# EAGLE board tm4cShield_v2.0 (EAGLE 8.0.0)
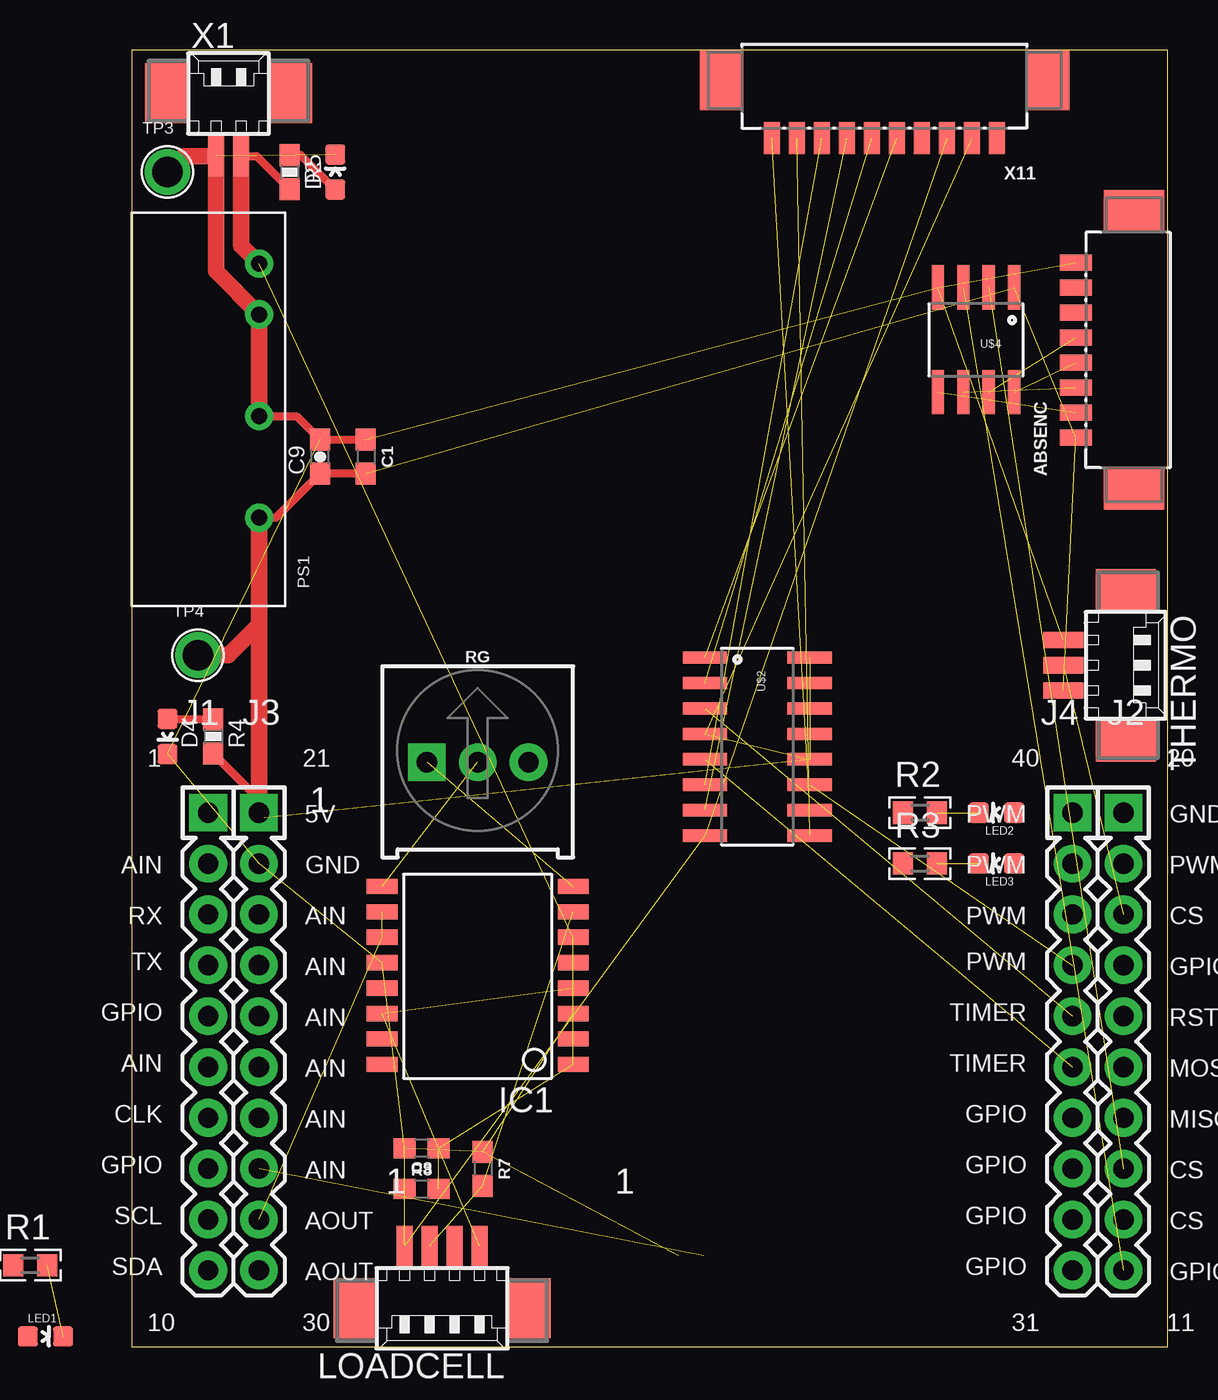
[diagram p0: board, top side]
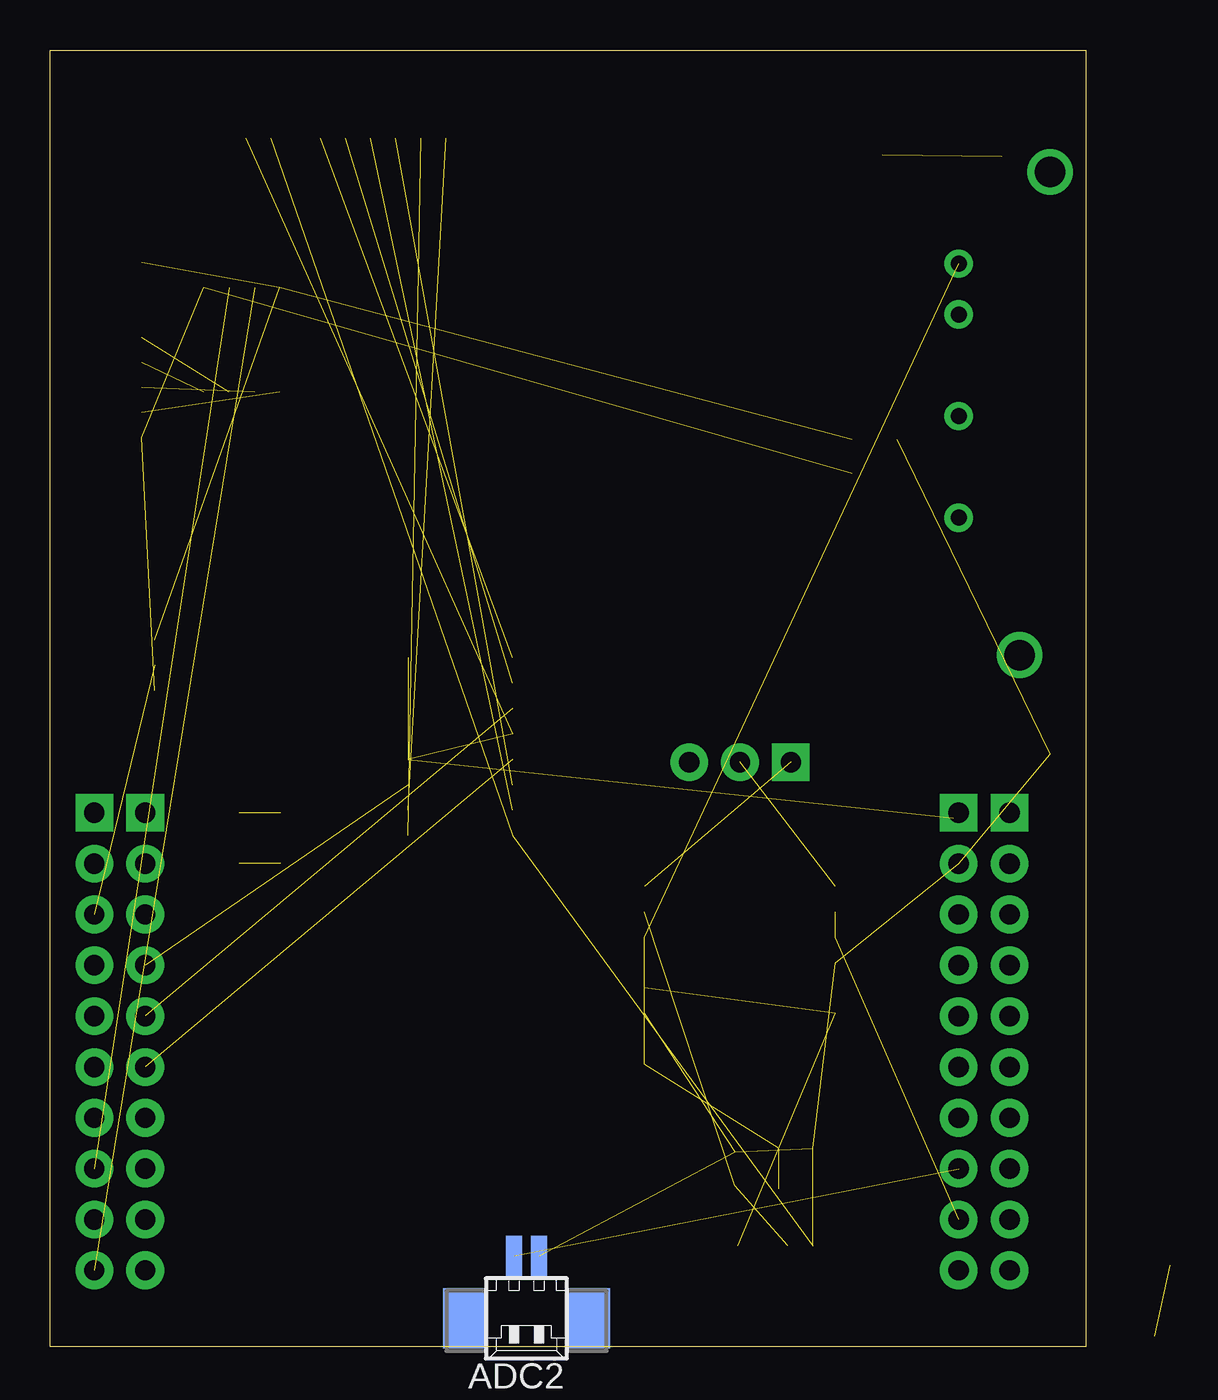
[diagram p1: board, bottom side, seen from below]

Size 51.74 x 64.76 mm. Coordinates in mm from the lower left corner, seen from the top.
Outline: 0,0 51.74,0 51.74,64.76 0,64.76 0,0
Copper layers (1*16): Top 0.035mm / dielectric 1.5mm / Bottom 0.035mm
Design rules "SparkFun": minimum track width 8mil, minimum drill 20mil, track to track 8mil, track to pad 8mil, pad to pad 8mil, via to via 8mil, smd to smd 8mil, copper to edge 10mil, drill to drill 8mil, minimum pad ring 12mil, minimum via ring 10mil, stop-mask expansion 4mil, vias tented up to drill 25mil, thermal gap 10mil

## Footprints (pad centres in the part's own frame; a part is rotated, then mirrored left to right if it is on the bottom)
4X10-BOOSTERPACK = drill 1.016 pad 1.88 square: 1 0,10.16; 20 45.72,10.16; 21 2.54,10.16; 40 43.18,10.16 | drill 1.016 pad 1.88: 2 0,7.62; 3 0,5.08; 4 0,2.54; 5 0,0; 6 0,-2.54; 7 0,-5.08; 8 0,-7.62; 9 0,-10.16; 10 0,-12.7; 11 45.72,-12.7; 12 45.72,-10.16; 13 45.72,-7.62; 14 45.72,-5.08; 15 45.72,-2.54; 16 45.72,0; 17 45.72,2.54; 18 45.72,5.08; 19 45.72,7.62; 22 2.54,7.62; 23 2.54,5.08; 24 2.54,2.54; 25 2.54,0; 26 2.54,-2.54; 27 2.54,-5.08; 28 2.54,-7.62; 29 2.54,-10.16; 30 2.54,-12.7; 31 43.18,-12.7; 32 43.18,-10.16; 33 43.18,-7.62; 34 43.18,-5.08; 35 43.18,-2.54; 36 43.18,0; 37 43.18,2.54; 38 43.18,5.08; 39 43.18,7.62
PB-53261-08 = smd 0.8 x 1.6: 1 -4.375,1.1; 2 -3.125,1.1; 3 -1.875,1.1; 4 -0.625,1.1; 5 0.625,1.1; 6 1.875,1.1; 7 3.125,1.1; 8 4.375,1.1 | smd 2.1 x 3: MNT1 -6.925,-1.8; MNT2 6.925,-1.8
53261-02 = smd 0.8 x 2: 1 0.625,-2.5; 2 -0.625,-2.5 | smd 2.1 x 3: S1 3.125,0.625; S2 -3.125,0.625
0603 = smd 1.1 x 1: 1 -0.85,0; 2 0.85,0
0603-CAP = smd 1.1 x 1: 1 -0.85,0; 2 0.85,0
LED-0603 = smd 1 x 1: A 0,-0.877; C 0,0.877
SO16-1 = smd 0.762 x 1.524: 1 -4.445,-4.775; 2 -3.175,-4.775; 3 -1.905,-4.775; 4 -0.635,-4.775; 5 0.635,-4.775; 6 1.905,-4.775; 7 3.175,-4.775; 8 4.445,-4.775; 9 4.445,4.775; 10 3.175,4.775; 11 1.905,4.775; 12 0.635,4.775; 13 -0.635,4.775; 14 -1.905,4.775; 15 -3.175,4.775; 16 -4.445,4.775
53261-04 = smd 0.8 x 2: 1 1.875,-2.5; 2 0.625,-2.5; 3 -0.625,-2.5; 4 -1.875,-2.5 | smd 2.1 x 3: S1 4.375,0.625; S2 -4.375,0.625
MURATA_NMG = drill 0.8: VIN+ 2.54,6.35; VIN- 5.08,6.35; VOUT+ 15.24,6.35; VOUT- 10.16,6.35
RESC0603 = smd 1 x 1.1: 1 -0.85,0; 2 0.85,0
0603-RES = smd 1.1 x 1: 1 -0.85,0; 2 0.85,0
TRIMPOT-PTH-3386U = drill 1.016 pad 1.88 square: 1 -2.54,-0.015 | drill 1.016 pad 1.88: 2 0,-0.015; 3 2.54,-0.015
53261-03 = smd 0.8 x 2: 1 1.25,-2.5; 2 0,-2.5; 3 -1.25,-2.5 | smd 2.1 x 3: S1 3.75,0.625; S2 -3.75,0.625
5000_SERIES_TESTPOINT = drill 1.524 pad 2.032: P$1 0,0
SOIC16 = smd 0.61 x 2.21: 1 -4.445,-2.616; 2 -3.175,-2.616; 3 -1.905,-2.616; 4 -0.635,-2.616; 5 0.635,-2.616; 6 1.905,-2.616; 7 3.175,-2.616; 8 4.445,-2.616; 9 4.445,2.616; 10 3.175,2.616; 11 1.905,2.616; 12 0.635,2.616; 13 -0.635,2.616; 14 -1.905,2.616; 15 -3.175,2.616; 16 -4.445,2.616
SOIC8 = smd 0.61 x 2.21: 1 -1.905,-2.616; 2 -0.635,-2.616; 3 0.635,-2.616; 4 1.905,-2.616; 5 1.905,2.616; 6 0.635,2.616; 7 -0.635,2.616; 8 -1.905,2.616
PB-53261-10 = smd 0.8 x 1.6: 1 -5.625,1.1; 2 -4.375,1.1; 3 -3.125,1.1; 4 -1.875,1.1; 5 -0.625,1.1; 6 0.625,1.1; 7 1.875,1.1; 8 3.125,1.1; 9 4.375,1.1; 10 5.625,1.1 | smd 2.1 x 3: MNT1 -8.175,-1.8; MNT2 8.175,-1.8

## Placement (x,y rotation side)
A1  [4X10-BOOSTERPACK]  3.81,16.51 0 top
ABSENC  x5  [PB-53261-08]  48.26,49.78 90 top
ADC2  x3  [53261-02]  27.94,2.03 180 bottom
C1  0.1uF  [0603]  11.68,44.45 270 top
C3  0.1uF  [0603]  14.48,7.87 0 top
C9  2.2u  [0603-CAP]  9.4,44.45 90 top
D2  12V  [LED-0603]  10.16,58.67 0 top
D4  5V  [LED-0603]  1.78,30.48 180 top
IC1  INA125U  [SO16-1]  17.27,18.54 90 top
LED1  [LED-0603]  -4.32,0.51 270 top  (outside the outline)
LED2  [LED-0603]  43.18,26.67 90 top
LED3  [LED-0603]  43.18,24.13 90 top
LOADCELL  x2  [53261-04]  15.49,2.54 180 top
PS1  12/5  [MURATA_NMG]  0,56.64 270 top
R1  [RESC0603]  -5.08,4.06 0 top  (outside the outline)
R2  [RESC0603]  39.37,26.67 0 top
R3  [RESC0603]  39.37,24.13 0 top
R4  1k  [0603-RES]  4.06,30.48 270 top
R5  4k7  [0603-RES]  7.87,58.67 270 top
R7  10k  [0603]  17.53,8.89 270 top
R8  10k  [0603]  14.48,9.91 180 top
RG  10k  [TRIMPOT-PTH-3386U]  17.27,29.21 0 top
THERMO  x4  [53261-03]  49.02,34.04 270 top
TP3  GND  [5000_SERIES_TESTPOINT]  1.78,58.67 0 top
TP4  5V  [5000_SERIES_TESTPOINT]  3.3,34.54 0 top
U$2  SN75175  [SOIC16]  31.24,29.97 270 top
U$4  SP490  [SOIC8]  42.16,50.29 180 top
X1  x1  [53261-02]  4.83,61.98 0 top
X11  [PB-53261-10]  37.59,61.47 180 top

## Library data of the parts
A1 LED1-LED3 R1-R3 = EAGLE_BoosterPack_Library
ABSENC = pel_molex; PARTNO: 0532610871
ADC2 X1 = con-molex; OC_FARNELL: 1125373; OC_NEWARK: unknown
C1 C3 = SparkFun-Capacitors; PROD_ID: CAP-00810
C9 = test_Beast_Elmo_Twitter_Carrier_Board_V1; MPN: GRM188R61H225KE11D
D2 = test_Beast_Elmo_Twitter_Carrier_Board_V1; MPN: LY L296-Q2R2-26-Z
D4 = test_Beast_Elmo_Twitter_Carrier_Board_V1; MPN: LB L293-M2P1-36-1-Z
IC1 = burr-brown; MF: TEXAS INSTRUMENT CONNECTORS; MPN: INA125U; OC_FARNELL: 1304375; OC_NEWARK: 80K5901
LOADCELL = con-molex; OC_FARNELL: 1125374; OC_NEWARK: unknown
PS1 = murata-supplys; MPN: NMG2405SC
R4 = test_Beast_Elmo_Twitter_Carrier_Board_V1; MPN: CRCW06031K00FKEA
R5 = test_Beast_Elmo_Twitter_Carrier_Board_V1; MPN: CRCW06034K70FKEA
R7 R8 = SparkFun-Resistors; PROD_ID: RES-12535
RG = SparkFun-Resistors; PROD_ID: RES-09730; SF_SKU: COM-09806
THERMO = con-molex; MF: MOLEX; MPN: 53261-0390; OC_FARNELL: 1125359; OC_NEWARK: 57H5006
TP3 TP4 = testpad; COLOR: White; MPN: 5002
U$2 = RoMeLa; PARTNO: SN75175DR
U$4 = RoMeLa; PARTNO: SP490CN-L
X11 = pel_molex; PARTNO: 0532611071

## Nets
3.3V: A1.1
5V: A1.21 ABSENC.1 C1.2 C9.1 PS1.VOUT+ R4.2 THERMO.1 TP4.P$1 U$2.4 U$2.12 U$2.16 U$4.1 X11.2
CASE: ABSENC.7
CH_A: U$2.2 X11.6
CH_A*: U$2.1 X11.5
CH_B: U$2.6 X11.8
CH_B*: U$2.7 X11.7
CH_I: U$2.10 X11.10
CH_I*: U$2.9 X11.9
CLOCK+: ABSENC.2 U$4.5
CLOCK-: ABSENC.3 U$4.6
DATA+: ABSENC.4 U$4.8
DATA-: ABSENC.5 U$4.7
GND: A1.22 ABSENC.8 ADC2.2 C1.1 C3.1 C9.2 D2.C D4.C IC1.3 IC1.12 LOADCELL.1 PS1.VIN- PS1.VOUT- R7.1 R8.2 THERMO.3 TP3.P$1 U$2.8 U$4.4 X1.2 X11.3
N$1: D4.A R4.1
N$2: LED1.C R1.2
N$3: IC1.8 RG.1
N$6: LED2.C R2.2
N$7: LED3.C R3.2
N$9: ABSENC.6
N$10: IC1.9 RG.2
N$14: A1.20
N$17: U$2.13
N$20: U$2.14
N$21: U$2.15
N$35: D2.A R5.1
PA2: A1.11 U$4.3
PA3: A1.12
PA4: A1.13 U$4.2
PA5: A1.8
PA6: A1.9
PA7: A1.10
PB0: A1.3
PB1: A1.4
PB2: A1.19
PB3: A1.38
PB4: A1.7
PB5: A1.2
PB6: A1.14
PB7: A1.15
PC4: A1.37 U$2.11
PC5: A1.36 U$2.3
PC6: A1.35 U$2.5
PC7: A1.34
PD0: A1.23
PD1: A1.24
PD2: A1.25
PD3: A1.26
PD6: A1.33
PD7: A1.32
PE0: A1.18 THERMO.2
PE1: A1.27
PE2: A1.28 ADC2.1
PE3: A1.29 IC1.10 IC1.11
PE4: A1.5
PE5: A1.6
PF0: A1.17
PF1: A1.30
PF2: A1.40
PF3: A1.39
PF4: A1.31
RST: A1.16
V+: LOADCELL.3
V-: IC1.7 LOADCELL.2 R7.2
V_2.5: IC1.4 IC1.5 IC1.14 LOADCELL.4
VIN: C3.2 IC1.1 IC1.2 IC1.6 PS1.VIN+ R5.2 R8.1 X1.1

## Tracks (layer width: path | path; a pad name or v marks a point on that pad's centre or on a via)
5V  (7 unrouted)
  Top 0.406: PS1.VOUT+ 7.2,41.4 C9.1 C1.2 | A1.21 6.35,27.34 R4.2
  Top 0.813: 6.35,36.07 6.35,26.92 6.86,26.42 6.6,26.42 A1.21 | 6.35,36.07 PS1.VOUT+ | TP4.P$1 4.83,34.54 6.35,36.07
CH_A  (1 unrouted)
CH_A*  (1 unrouted)
CH_B  (1 unrouted)
CH_B*  (1 unrouted)
CH_I  (1 unrouted)
CH_I*  (1 unrouted)
CLOCK+  (1 unrouted)
CLOCK-  (1 unrouted)
DATA+  (1 unrouted)
DATA-  (1 unrouted)
GND  (15 unrouted)
  Top 0.406: PS1.VOUT- 8.22,46.48 C9.2 C1.1
  Top 0.813: TP3.P$1 2.58,59.48 X1.2 4.2,53.71 PS1.VIN- PS1.VOUT-
N$1
  Top 0.406: R4.1 1.8,31.33 D4.A
N$2  (1 unrouted)
N$3  (1 unrouted)
N$6  (1 unrouted)
N$7  (1 unrouted)
N$10  (1 unrouted)
N$35
  Top 0.406: R5.1 8.43,59.52 D2.A
PA2  (1 unrouted)
PA4  (1 unrouted)
PC4  (1 unrouted)
PC5  (1 unrouted)
PC6  (1 unrouted)
PE0  (1 unrouted)
PE2  (1 unrouted)
PE3  (2 unrouted)
V-  (2 unrouted)
V_2.5  (3 unrouted)
VIN  (5 unrouted)
  Top 0.406: X1.1 6.22,59.48 R5.2
  Top 0.813: X1.1 5.45,55 PS1.VIN+

## Text on the board
tPlace: 1 | 1 | 1